# Altium PCB STM32H743_PCB.PcbDoc (part 2 of 2)
Units mm, origin at the board's own origin, x right, y up, seen from the top; angles counter-clockwise.
Board outline 65 x 50 mm, 4 copper layers (Top, Signal, GND, Bottom), stack 0.603 mm thick; 86 components, 110 nets, 449 pads, 169 vias.
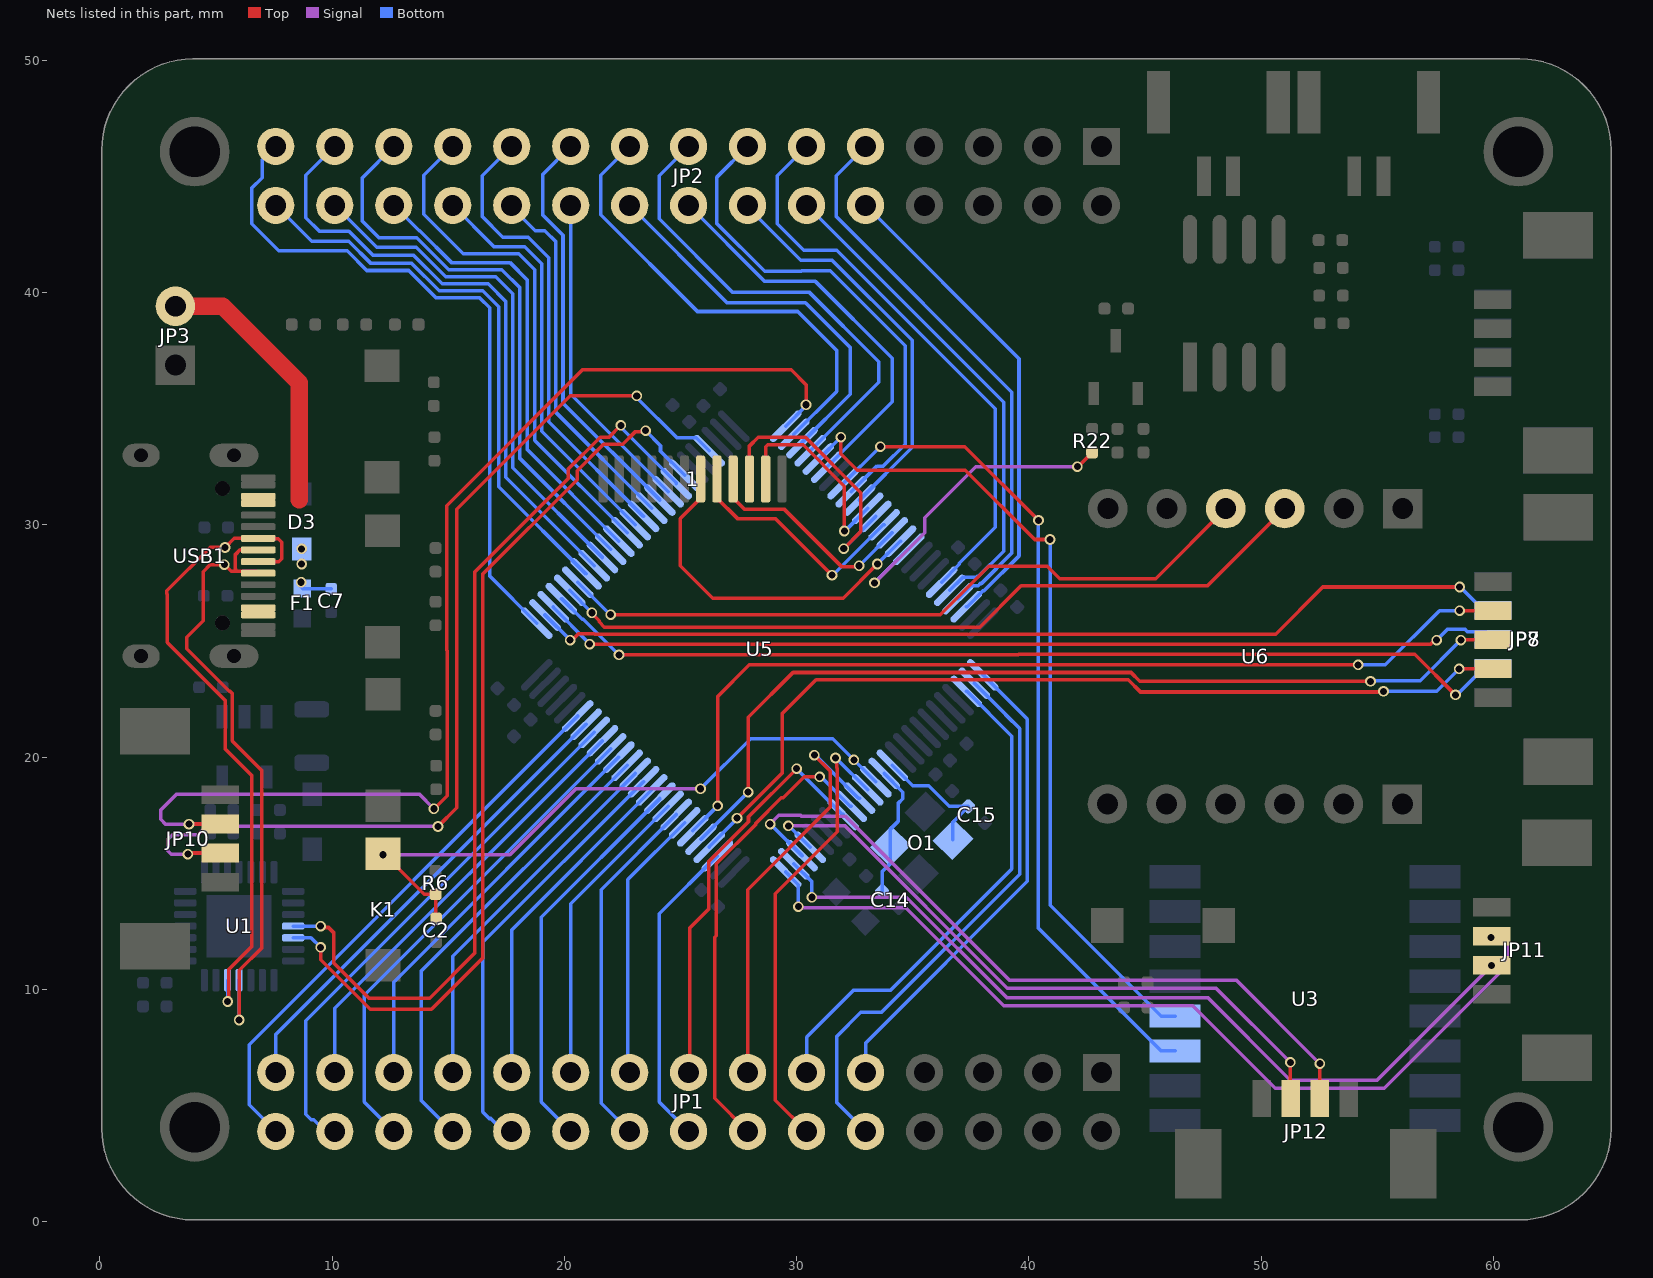
[diagram p4: the nets of this part, all layers, seen from the top]

## Via types
v1: diameter 0.457, hole 0.305, Top to Bottom, 159 vias
v2: diameter 0.711, hole 0.356, Top to Bottom, 10 vias

## Nets (pads, with @x,y where several pads share a name; then routed paths per layer and width w, separated by ;. In a path a pad name is that pad's centre, name@x,y a point inside that pad or via, vN(x,y) a via of type N, cw(c..) or ccw(c..) an arc to the next point about the centre after c; other vN are vias at no path point) (continued)
NRST: C2.2 K1.1 R6.1 U5.14 | length 28.1
  Top w0.152: K1.1@12.192,15.837 12.242,15.837 12.866,15.213 12.866,15.201 13.97,14.097 R6.1@14.453,14.097 14.465,14.084 14.465,13.068 C2.2@14.478,13.056
  Signal w0.152: v1(12.192,15.799) 17.653,15.799 20.498,18.644 v1(25.857,18.644)
  Bottom w0.152: v1(25.857,18.644) 28.016,20.803 31.547,20.803 v1(32.461,19.888) 33.402,18.947 U5.14@33.412,18.947
OSC_IN: C15.2 O1.3 U5.12 | length 5.7
  Bottom w0.152: U5.12@34.119,19.654 35.003,18.771 35.687,18.771 36.572,17.885 C15.2@37.385,17.885 37.012,17.512 37.012,17.475 36.726,17.189 O1.3@36.726,16.448
OSC_OUT: C14.2 O1.1 U5.13 | length 5.8
  Bottom w0.152: C14.2@33.677,14.228 33.677,15.063 34.039,15.425 O1.1@34.039,16.165 34.039,16.906 34.366,17.234 34.366,18.009 34.569,18.212 34.569,18.497 U5.13@33.766,19.301
PA4: JP1.16 U5.28 | length 13.4
  Bottom w0.152: JP1.16@25.349,3.886 24.079,5.156 24.079,13.256 U5.28@26.588,15.765
PA8: JP2.20 U5.67 | length 14.1
  Bottom w0.152: JP2.20@20.269,43.764 20.269,35.625 U5.67@24.467,31.428
PA15: JP2.17 U5.77 | length 20.4
  Bottom w0.152: JP2.17@22.809,46.304 21.565,45.06 21.565,43.358 25.73,39.192 30.048,39.192 31.725,37.516 31.725,35.751 U5.77@29.877,33.903
PB0: JP1.19 U5.34 | length 13.2
  Bottom w0.152: JP1.19@20.269,6.426 20.269,13.689 U5.34@24.467,17.886
PB1: JP1.20 U5.35 | length 17
  Bottom w0.152: JP1.20@20.269,3.886 18.999,5.156 18.999,13.106 24.113,18.22 U5.35@24.113,18.24
PB2: JP1.21 U5.36 | length 14.7
  Bottom w0.152: JP1.21@17.729,6.426 17.729,12.563 U5.36@23.76,18.593
PB8: JP2.11 U5.95 | length 25
  Bottom w0.152: JP2.11@30.429,46.304 29.159,45.034 29.159,42.977 30.302,41.834 31.725,41.834 38.557,35.001 38.557,29.896 37.008,28.346 37.008,28.306 U5.95@36.241,27.539
PB9: JP2.12 U5.96 | length 21.4
  Bottom w0.152: JP2.12@30.429,43.764 38.913,35.281 38.913,28.868 37.83,27.786 37.787,27.786 37.741,27.741 37.149,27.741 U5.96@36.594,27.185
PB12: JP2.29 U5.51 | length 29.9
  Bottom w0.152: JP2.29@7.569,46.304 6.985,45.72 6.985,44.958 6.541,44.514 6.541,42.964 7.696,41.808 10.643,41.808 11.493,40.958 13.298,40.958 14.479,39.776 16.358,39.776 16.777,39.358 16.777,27.804 U5.51@18.81,25.771
PC0: JP1.12 U5.15 | length 19.7
  Top w0.152: JP1.12@30.429,3.886 29.083,5.232 29.083,14.122 31.75,16.789 31.75,19.532 31.732,19.55 31.732,19.906 v1(31.674,19.964)
  Bottom w0.152: v1(31.674,19.964) 31.688,19.964 U5.15@33.059,18.593
PC1: JP1.13 U5.16 | length 18.1
  Top w0.152: JP1.13@27.889,6.426 27.889,14.3 31.445,17.856 31.445,19.406 v1(30.759,20.091)
  Bottom w0.152: v1(30.759,20.091) 30.814,20.091 32.665,18.24 U5.16@32.705,18.24
PC2: JP1.14 U5.17 | length 20.1
  Top w0.152: JP1.14@27.889,3.886 26.467,5.309 26.467,12.243 26.543,12.319 26.543,15.41 28.231,17.098 28.231,17.142 29.338,18.25 29.426,18.25 30.328,19.152 v1(30.988,19.152)
  Bottom w0.152: v1(30.988,19.152) 31.046,19.152 32.311,17.886 U5.17@32.351,17.886
PC3: JP1.15 U5.18 | length 17.8
  Top w0.152: JP1.15@25.349,6.426 25.4,6.477 25.4,12.649 26.213,13.462 26.213,15.511 27.926,17.224 27.926,17.436 v1(29.997,19.507)
  Bottom w0.152: v1(29.997,19.507) 29.997,19.496 31.96,17.533 U5.18@31.998,17.533
PC4: JP1.17 U5.32 | length 11.8
  Bottom w0.152: JP1.17@22.809,6.426 22.733,6.502 22.733,14.732 25.174,17.173 U5.32@25.174,17.179
PC5: JP1.18 U5.33 | length 15.5
  Bottom w0.152: JP1.18@22.809,3.886 21.59,5.105 21.59,14.3 24.82,17.53 U5.33@24.82,17.533
PC6: JP2.24 U5.63 | length 17.8
  Bottom w0.152: JP2.24@15.189,43.764 16.967,41.986 18.288,41.986 19.025,41.25 19.025,34.042 U5.63@23.052,30.014
PC7: JP2.21 U5.64 | length 20
  Bottom w0.152: JP2.21@17.729,46.304 16.459,45.034 16.459,43.282 17.348,42.393 18.44,42.393 19.329,41.504 19.329,34.444 U5.64@23.406,30.367
PC8: JP2.22 U5.65 | length 15.8
  Bottom w0.152: JP2.22@17.729,43.764 17.729,43.688 18.745,42.672 19.152,42.672 19.634,42.189 19.634,34.846 U5.65@23.76,30.721
PC9: JP2.19 U5.66 | length 17.8
  Bottom w0.152: JP2.19@20.269,46.304 19.075,45.11 19.075,43.332 19.939,42.469 19.939,35.248 U5.66@24.113,31.074
PC10: JP2.18 U5.78 | length 17
  Bottom w0.152: JP2.18@22.809,43.764 27,39.573 30.378,39.573 32.309,37.643 32.309,35.628 U5.78@30.23,33.549
PC11: JP2.15 U5.79 | length 20.7
  Bottom w0.152: JP2.15@25.349,46.304 24.079,45.034 24.079,43.18 27.229,40.03 30.531,40.03 33.528,37.033 33.528,36.14 U5.79@30.584,33.196
PD0: JP2.16 U5.81 | length 17.4
  Bottom w0.152: JP2.16@25.349,43.764 28.626,40.488 30.81,40.488 34.112,37.186 34.112,35.31 U5.81@31.291,32.489
PD3: JP2.13 U5.84 | length 21.6
  Bottom w0.152: JP2.13@27.889,46.304 26.568,44.983 26.568,42.976 28.625,40.919 30.201,40.919 30.226,40.945 31.445,40.945 34.671,37.719 34.671,33.477 33.731,32.537 33.461,32.537 U5.84@32.351,31.428
PD4: JP2.14 U5.85 | length 17.4
  Bottom w0.152: JP2.14@27.889,43.764 27.889,43.688 30.175,41.402 31.521,41.402 34.976,37.948 34.976,33.345 U5.85@32.705,31.074
PD10: JP2.30 U5.57 | length 24.5
  Bottom w0.152: JP2.30@7.569,43.764 9.119,42.215 10.719,42.215 11.671,41.263 13.424,41.263 14.606,40.081 16.485,40.081 17.17,39.395 17.17,31.653 U5.57@20.931,27.892
PD11: JP2.27 U5.58 | length 26.6
  Bottom w0.152: JP2.27@10.109,46.304 8.865,45.06 8.865,43.231 9.45,42.645 10.72,42.645 11.76,41.605 13.513,41.605 14.732,40.386 16.713,40.386 17.475,39.624 17.475,32.055 U5.58@21.285,28.246
PD12: JP2.28 U5.59 | length 22.2
  Bottom w0.152: JP2.28@10.109,43.764 11.912,41.961 13.615,41.961 14.885,40.691 17.043,40.691 17.78,39.954 17.78,32.458 U5.59@21.638,28.6
PD13: JP2.25 U5.60 | length 24.6
  Bottom w0.152: JP2.25@12.649,46.304 11.303,44.958 11.303,43.078 12.014,42.367 13.64,42.367 15.011,40.996 17.297,40.996 18.085,40.208 18.085,32.86 U5.60@21.992,28.953
PD14: JP2.26 U5.61 | length 20
  Bottom w0.152: JP2.26@12.649,43.764 13.741,42.672 13.766,42.672 15.138,41.3 17.653,41.3 18.39,40.564 18.39,33.262 U5.61@22.345,29.307
PD15: JP2.23 U5.62 | length 22.2
  Bottom w0.152: JP2.23@15.189,46.304 13.945,45.06 13.945,43.383 15.646,41.681 18.034,41.681 18.72,40.996 18.72,33.639 U5.62@22.699,29.66
PE0: JP2.9 U5.97 | length 24.3
  Bottom w0.152: JP2.9@32.969,46.304 31.699,45.034 31.699,43.282 39.268,35.712 39.268,28.793 37.957,27.481 37.913,27.481 37.822,27.39 37.506,27.39 U5.97@36.948,26.832
PE1: JP2.10 U5.98 | length 21
  Bottom w0.152: JP2.10@32.969,43.764 39.573,37.16 39.573,28.667 38.083,27.176 38.039,27.176 37.341,26.478 U5.98@37.301,26.478
PE2: JP1.9 U5.1 | length 20.8
  Bottom w0.152: JP1.9@32.969,6.426 32.969,7.696 39.929,14.656 39.929,21.644 38.03,23.543 U5.1@38.008,23.543
PE3: JP1.10 U5.2 | length 24.4
  Bottom w0.152: JP1.10@32.969,3.886 31.725,5.131 31.725,7.976 32.766,9.017 33.655,9.017 39.599,14.961 39.599,21.234 39.014,21.819 39.014,21.83 U5.2@37.655,23.19
PE4: JP1.11 U5.3 | length 21.8
  Bottom w0.152: JP1.11@30.429,6.426 30.429,7.95 32.436,9.957 34.036,9.957 39.268,15.189 39.268,20.904 37.337,22.836 U5.3@37.301,22.836
PE7: JP1.22 U5.37 | length 18.7
  Bottom w0.152: JP1.22@17.729,3.886 17.39,3.886 16.832,4.444 16.765,4.444 16.485,4.724 16.485,12.026 U5.37@23.406,18.947
PE8: JP1.23 U5.38 | length 16.1
  Bottom w0.152: JP1.23@15.189,6.426 15.189,11.43 21.514,17.755 21.514,17.762 U5.38@23.052,19.301
PE9: JP1.24 U5.39 | length 20
  Bottom w0.152: JP1.24@15.189,3.886 15.164,3.886 13.843,5.207 13.843,10.798 U5.39@22.699,19.654
PE10: JP1.25 U5.40 | length 17.6
  Bottom w0.152: JP1.25@12.649,6.426 12.649,10.312 U5.40@22.345,20.008
PE11: JP1.26 U5.41 | length 21.4
  Bottom w0.152: JP1.26@12.649,3.886 11.379,5.156 11.379,9.749 U5.41@21.992,20.361
PE12: JP1.27 U5.42 | length 19.1
  Bottom w0.152: JP1.27@10.109,6.426 10.109,9.186 U5.42@21.638,20.715
PE13: JP1.28 U5.43 | length 23.1
  Bottom w0.152: JP1.28@10.109,3.886 9.717,3.886 9.211,4.393 9.094,4.393 8.865,4.623 8.865,8.648 U5.43@21.285,21.068
PE14: JP1.29 U5.44 | length 20.5
  Bottom w0.152: JP1.29@7.569,6.426 7.569,8.06 U5.44@20.931,21.422
PE15: JP1.30 U5.45 | length 24.2
  Bottom w0.152: JP1.30@7.569,3.886 6.426,5.029 6.426,7.624 U5.45@20.578,21.775
SPI1_MISO: JP7.3 U5.30 | length 39.8
  Top w0.152: v1(27.907,18.499) 27.915,18.506 27.915,21.717 29.845,23.647 44.398,23.647 44.779,23.266 v1(54.712,23.266) ; v1(58.598,25.044) 58.609,25.056 JP7.3@59.978,25.056
  Bottom w0.152: U5.30@25.881,16.472 v1(27.907,18.499) ; v1(54.712,23.266) 54.737,23.292 56.845,23.292 v1(58.598,25.044)
SPI1_MOSI: JP7.4 U5.31 | length 41.1
  Top w0.152: v1(26.594,17.907) 26.594,22.606 27.965,23.978 v1(54.178,23.978) ; v1(58.547,26.314) 58.555,26.306 JP7.4@59.978,26.306
  Bottom w0.152: U5.31@25.527,16.826 25.527,16.833 26.594,17.9 v1(26.594,17.907) ; v1(54.178,23.978) 55.347,23.978 57.683,26.314 v1(58.547,26.314)
SPI1_SCK: JP7.2 U5.29 | length 38.9
  Top w0.152: v1(27.43,17.375) 29.388,19.333 29.388,21.895 30.836,23.343 44.272,23.343 44.806,22.809 55.245,22.809 v1(55.27,22.835) ; v1@58.522,23.8 v1(58.528,23.806) JP7.2@59.978,23.806
  Bottom w0.152: U5.29@26.234,16.119 26.234,16.149 27.43,17.345 v1(27.43,17.375) ; v1(55.27,22.835) 57.556,22.835 v1(58.528,23.806)
SPI2_MISO: JP8.3 U5.53 | length 41.6
  Top w0.152: v1(21.082,24.867) 57.296,24.867 57.474,25.044 v1(57.556,25.044)
  Bottom w0.152: U5.53@19.517,26.478 19.517,26.455 21.082,24.89 v1(21.082,24.867) ; v1(57.556,25.044) 58.014,25.502 58.787,25.502 58.881,25.407 59.654,25.407 JP8.3@59.978,25.084
SPI2_MOSI: JP8.4 U5.54 | length 42.3
  Top w0.152: v1(22.352,24.409) 39.542,24.409 39.567,24.435 56.617,24.435 v1(58.369,22.682)
  Bottom w0.152: U5.54@19.87,26.832 19.875,26.832 20.771,25.935 20.813,25.935 22.338,24.409 v1(22.352,24.409) ; v1(58.369,22.682) 58.427,22.682 59.578,23.834 JP8.4@59.978,23.834
SPI2_SCK: JP8.2 U5.52 | length 42.6
  Top w0.152: v1(20.244,25.044) 20.326,25.044 20.606,25.324 21.271,25.324 21.297,25.298 50.622,25.298 52.654,27.33 v1(58.547,27.33)
  Bottom w0.152: U5.52@19.163,26.125 v1(20.244,25.044) ; v1(58.547,27.33) 58.581,27.33 59.578,26.334 JP8.2@59.978,26.334
SPI3_MOSI: 1.10 U5.87 | length 12.2
  Top w0.152: 1.10@27.966,31.979 27.966,33.402 28.346,33.782 30.378,33.782 32.766,31.394 32.766,29.721 v1(32.026,28.981)
  Bottom w0.152: v1@31.877,28.981 v1(32.026,28.981) U5.87@33.412,30.367
SPI3_SCK: 1.9 U5.89 | length 9.5
  Top w0.152: 1.9@27.266,31.979 27.266,31.163 27.76,30.669 29.478,30.669 31.953,28.194 32.639,28.194 v1(32.69,28.245)
  Bottom w0.152: v1(32.69,28.245) 34.105,29.66 U5.89@34.119,29.66
SWCLK: JP10.2 U5.76 | length 49.1
  Top w0.152: v1(3.835,17.12) 3.841,17.125 JP10.2@5.182,17.125 ; v1(14.376,17.78) 14.397,17.78 14.961,18.344 14.961,24.577 14.935,24.602 14.935,30.836 20.777,36.678 29.769,36.678 30.404,36.043 v1(30.404,35.179)
  Signal w0.152: v1@3.785,17.069 v1(3.835,17.12) 2.819,17.12 2.616,17.323 2.616,17.729 3.302,18.415 13.741,18.415 v1(14.376,17.78)
  Bottom w0.152: U5.76@29.523,34.256 30.378,35.112 30.378,35.154 v1(30.404,35.179)
SWDIO: JP10.3 U5.72 | length 42.6
  Top w0.152: v1(3.785,15.824) 3.835,15.875 JP10.3@5.182,15.875 ; v1(14.554,17.018) 15.367,17.831 15.367,30.683 20.244,35.56 v1(23.114,35.56)
  Signal w0.152: v1(3.785,15.824) 3.073,15.824 2.921,15.977 2.921,16.459 3.124,16.662 4.216,16.662 4.572,17.018 v1(14.554,17.018)
  Bottom w0.152: v1(23.114,35.56) 23.114,35.484 24.847,33.751 25.679,33.751 U5.72@26.234,33.196
TFT_BLK: R22.2 U5.91 | length 14.2
  Top w0.152: v1(42.088,32.512) 42.113,32.512 R22.2@42.723,33.122
  Signal w0.152: v1(33.35,27.508) 35.509,29.667 35.509,30.314 37.707,32.512 v1(42.088,32.512)
  Bottom w0.152: v1(33.35,27.508) 34.795,28.953 U5.91@34.826,28.953
TFT_CS: 1.8 U5.88 | length 10.3
  Top w0.152: 1.8@26.566,31.979 26.566,31.163 27.452,30.277 29.083,30.277 v1(31.521,27.838)
  Bottom w0.152: v1(31.521,27.838) 31.556,27.838 33.731,30.014 U5.88@33.766,30.014
TFT_DC: 1.7 U5.90 | length 15.2
  Top w0.152: 1.7@25.866,31.979 25.866,31.163 25.324,30.62 25.324,30.607 24.994,30.277 24.994,28.245 26.391,26.848 32.004,26.848 v1(33.477,28.321)
  Bottom w0.152: v1(33.477,28.321) 34.463,29.307 U5.90@34.473,29.307
TFT_RES: 1.11 U5.86 | length 8.9
  Top w0.152: 1.11@28.666,31.979 28.666,33.363 28.755,33.452 30.278,33.452 32.055,31.675 v1(32.055,29.743)
  Bottom w0.152: v1(32.055,29.743) 32.081,29.743 U5.86@33.059,30.721
UART1_RX: U1.26 U5.69 | length 39.6
  Top w0.152: v1(9.5,11.811) 9.5,11.278 11.633,9.144 14.275,9.144 16.485,11.354 16.485,27.889 20.549,31.953 20.549,32.342 21.684,33.477 22.509,33.477 23.038,34.006 23.439,34.006 v1(23.495,34.061)
  Bottom w0.152: U1.26@8.319,12.225 9.085,12.225 v1(9.5,11.811) ; v1(23.495,34.061) 24.138,33.419 24.138,33.171 U5.69@25.174,32.135
UART1_TX: U1.25 U5.68 | length 39.7
  Top w0.152: v1(9.5,12.725) 9.558,12.667 9.844,12.667 10.058,12.452 10.058,11.15 11.582,9.627 14.199,9.627 16.129,11.557 16.129,27.965 20.155,31.991 20.155,32.398 21.539,33.782 21.92,33.782 v1(22.428,34.29)
  Bottom w0.152: U1.25@8.319,12.725 v1(9.5,12.725) ; v1(22.428,34.29) 22.428,34.213 24.82,31.821 U5.68@24.82,31.782
UART2_RX: JP11.3 U5.25 | length 39.4
  Signal w0.152: v1(30.074,13.564) 30.124,13.513 34.696,13.513 38.913,9.296 47.054,9.296 50.61,5.74 55.296,5.74 60.604,11.049 60.604,11.9 60.319,12.184 59.952,12.184 v1(59.893,12.243)
  Bottom w0.152: U5.25@29.523,15.058 30.074,14.507 v1(30.074,13.564)
UART2_TX: JP11.2 U5.24 | length 36.3
  Signal w0.152: v1(30.658,13.97) 34.725,13.97 39.043,9.652 47.701,9.652 51.257,6.096 54.991,6.096 v1(59.919,11.024)
  Bottom w0.152: U5.24@29.877,15.411 30.658,14.63 v1(30.658,13.97)
UART3_RX: U5.56 U6.4 | length 30.8
  Top w0.152: v1(21.988,26.137) 36.181,26.137 38.264,28.219 40.792,28.219 41.326,27.686 45.457,27.686 U6.4@48.478,30.707
  Bottom w0.152: U5.56@20.578,27.539 21.98,26.137 v1(21.988,26.137) v1@21.996,26.137
UART3_TX: U5.55 U6.3 | length 33.6
  Top w0.152: v1(21.184,26.219) 21.184,26.19 21.492,25.881 21.492,25.828 21.717,25.603 37.883,25.603 39.661,27.381 47.692,27.381 U6.3@51.018,30.707
  Bottom w0.152: U5.55@20.224,27.185 21.184,26.226 v1(21.184,26.219) v1@21.184,26.213
UART4_RX: JP12.3 U5.23 | length 31.7
  Top w0.152: v1(52.527,6.807) 52.529,6.806 JP12.3@52.529,5.3
  Signal w0.152: v1(28.854,17.12) 29.235,17.501 30.175,17.501 30.226,17.45 32.107,17.45 39.169,10.389 48.946,10.389 v1(52.527,6.807)
  Bottom w0.152: v1(28.854,17.12) 28.875,17.12 U5.23@30.23,15.765
UART4_TX: JP12.2 U5.22 | length 28.7
  Top w0.152: v1(51.257,6.858) 51.257,5.321 JP12.2@51.279,5.3
  Signal w0.152: v1(29.642,17.043) 32.083,17.043 39.068,10.058 48.057,10.058 v1(51.257,6.858)
  Bottom w0.152: v1(29.642,17.043) 29.659,17.043 U5.22@30.584,16.119
UART5_RX: U3.3 U5.83 | length 36
  Top w0.152: v1(33.604,33.376) 37.236,33.376 v1(40.411,30.201)
  Bottom w0.152: U5.83@31.998,31.782 33.592,33.376 v1(33.604,33.376) ; v1(40.411,30.201) 40.411,12.632 45.692,7.351 U3.3@46.292,7.351
UART5_TX: U3.4 U5.80 | length 35.7
  Top w0.152: v1(31.902,33.782) 31.902,33.071 32.614,32.36 37.262,32.36 40.246,29.375 v1(40.907,29.375)
  Bottom w0.152: U5.80@30.937,32.842 30.963,32.842 v1(31.902,33.782) ; v1@40.894,29.388 v1(40.907,29.375) 40.919,29.362 40.919,13.624 45.692,8.851 U3.4@46.292,8.851
USB_DN: U1.5 USB1.A7 USB1.B7 | length 28.3
  Top w0.152: v1(5.494,9.482) 5.537,9.525 5.537,10.846 6.528,11.836 6.528,19.228 5.385,20.371 5.385,22.454 2.896,24.943 2.896,27.026 2.883,27.039 2.883,27.165 4.75,29.032 v1(5.385,29.032) 5.779,29.427 USB1.B7@6.813,29.427 6.826,29.413 7.671,29.413 7.823,29.261 7.823,28.55 7.696,28.423 6.817,28.423 USB1.A7@6.813,28.427
  Bottom w0.152: v1@5.486,9.474 v1(5.494,9.482) U1.5@5.494,10.401
USB_DP: U1.4 USB1.A6 USB1.B6 | length 27.5
  Top w0.152: v1(5.994,8.687) 5.994,10.82 6.96,11.786 6.96,19.431 5.69,20.701 5.69,22.745 5.6,22.835 5.563,22.835 3.734,24.663 3.734,25.171 4.445,25.883 4.445,27.991 4.75,28.296 v1(5.359,28.296) 5.655,28 5.914,28 ; USB1.B6@6.813,27.927 6.739,28 5.914,28 ; USB1.A6@6.813,28.927 6.809,28.931 6.033,28.931 5.834,28.732 5.834,28.08 5.914,28
  Bottom w0.152: v1(5.994,8.687) U1.4@5.994,10.401
VBUS: C7.2 D3.2 F1.1 JP3.2 USB1.A4 USB1.A9 USB1.B4 USB1.B9 | length 13
  Top w0.762: JP3.2@3.251,39.421 5.283,39.421 8.585,36.119 8.585,31.09
  Bottom w0.152: F1.1@8.712,27.269 8.727,27.254 C7.2@9.957,27.254
  other v1: 8.661,27.534 8.687,28.321 8.687,28.97
pads on no net: H1.1 H2.1 H3.1 H4.1 JP4.0 JP5.0 JP6.3 JP6.4 JP7.0 JP8.0 JP9.3 JP9.4 JP10.0 JP11.0 JP12.0 U1.1 U1.2 U1.6 U1.10 U1.11 U1.12 U1.13 U1.14 U1.15 U1.16 U1.17 U1.18 U1.19 U1.20 U1.21 U1.22 U1.23 U1.24 U1.27 U1.28 U3.5 U3.6 U3.7 U3.8 U3.9 U3.10 U3.13 U3.14 U3.15 U6.1 U6.6 U6.7 U6.8 U6.9 U6.10 U6.11 U6.12 USB1.0 USB1.A8 USB1.B8

## Polygon pours and split planes (outlines as drawn)
GND on Top "GND_L01_P007" (solid, pour order 7): 0.127,50.038 0.102,50.013 0.102,0.051 65.075,0.051 65.075,50.038
VBUS on Top "VBUS_L01_P000" (solid, pour order 0): 6.071,31.369 9.296,31.369 9.296,25.959 5.994,25.959 5.994,26.518 7.874,26.518 7.874,30.759 7.849,30.785 6.071,30.785
GND on Bottom "GND_L04_P008" (solid, pour order 8): 0.102,50.063 0.102,0.051 65.075,0.051 65.075,50.038
+5V on Bottom "+5V_L04_P003" (solid, pour order 3): 9.068,26.34 9.068,22.708 5.69,22.708 5.69,21.107 4.775,21.107 4.775,23.393 7.163,23.393 7.163,26.34
3V3 on Bottom "3V3_L04_P005" (solid, pour order 5): 10.109,20.142 10.109,17.399 7.341,17.399 7.315,17.374 7.315,18.186 7.341,18.186 8.052,18.898 8.052,20.142
VBUS on Bottom "VBUS_L04_P001" (solid, pour order 1): 9.119,29.489 9.119,26.848 8.204,26.848 8.204,29.515
NetL1_1 on Bottom "NETL1_1_L04_P004" (solid, pour order 4): 9.881,22.403 9.881,21.26 6.858,21.26 6.858,22.403
GND on GND "GND_L03_P006" (solid, pour order 6): 0.152,50.038 0.102,49.987 0.102,0.051 65.151,0.051 65.075,0.127 65.075,50.038

## Other copper
Top:
  pour cut-out: 4.678,27.894 4.678,25.931 5.129,25.931 5.273,25.787 5.28,25.794 5.994,25.794 5.994,26.353 5.829,26.518 5.895,26.584 5.895,27.58 5.96,27.645 5.914,27.691 5.914,28 5.369,28 5.284,27.915 5.136,28.063 4.846,28.063
  pour cut-out: 4.242,18.085 4.242,17.452 4.468,17.677 5.191,17.677 5.191,17.731 5.265,17.804 5.255,17.815 5.255,17.823 4.229,17.823
  pour cut-out: 8.992,12.167 9.119,12.04 9.119,11.887 9.424,11.887 9.5,11.811 9.825,12.137 9.825,12.4 9.558,12.667 9.54,12.65 9.119,12.65
  pour cut-out: 12.827,16.256 12.827,15.24 13.97,14.097 14.607,14.097 14.864,14.355 14.864,15.108 13.511,16.461 13.3,16.461 13.094,16.255
  pour cut-out: 44.475,24.155 44.475,23.724 44.398,23.647 44.83,23.216 52.654,23.216 52.938,23.499 54.005,23.499 54.005,24.135 53.873,24.003 46.05,24.003 45.999,24.054 45.949,24.003 45.161,24.003
  pour cut-out: 50.444,25.121 53.238,25.121 53.924,24.435 56.617,24.435 59.004,22.047 60.757,22.047 61.048,22.338 61.048,23.671 61.542,23.671 61.722,23.851 61.697,23.876 61.697,27.369 61.126,27.94 59.157,27.94 58.547,27.33 52.654,27.33
  pour cut-out: 46.253,29.007 46.253,28.397 45.364,27.508 45.593,27.28 47.828,27.28 49.378,28.829 49.378,29.337 49.505,29.337 50.521,30.353 50.521,31.115 50.47,31.115 50.013,31.572 49.86,31.42 48.819,31.42 48.819,30.81 47.906,29.897 47.906,29.805 47.484,29.805 47.193,29.515
  pour cut-out: 40.343,29.608 39.561,28.827 39.561,28.252 40.759,28.252 41.326,27.686 41.935,28.296 41.935,28.885 41.077,29.743 37.948,29.743
  pour cut-out: 39.7,28.016 39.661,27.977 39.661,27.381 41.021,27.381 41.097,27.457 41.056,27.499 41.056,28.285 39.594,28.285 39.528,28.219
  pour cut-out: 36.449,26.264 36.551,26.162 36.551,25.679 38.159,25.679 38.307,25.531 39.622,25.531 39.622,25.682 38.227,27.076 37.033,27.076 36.881,26.924
  pour cut-out: 24.994,30.277 25.324,29.947 25.324,27.559 26.619,27.559 27.407,26.772 27.483,26.848 32.004,26.848 32.741,27.584 32.664,27.661 32.664,28.219 31.496,28.219 28.753,30.963 26.23,30.963 26.148,30.881
  pour cut-out: 14.478,16.637 15.367,15.748 15.773,15.748 15.773,27.711 21.184,33.122 22.016,33.122 23.279,34.384 22.307,35.357 21.031,35.357 15.164,29.489 15.164,18.547 14.961,18.344
  pour cut-out: 32.36,33.63 32.733,33.257 32.733,32.593 37.029,32.593 39.61,30.011 41.02,30.011 41.554,29.477 41.787,29.71 41.787,30.653 38.354,34.087 32.664,34.087 32.487,34.265
  pour cut-out: 22.022,35.357 22.022,34.493 22.809,33.706 28.524,33.706 29.647,34.829 30.253,34.829 30.253,36.523 29.616,37.16 25.095,37.16 24.816,36.881
  pour cut-out: 20.874,36.445 14.961,30.531 14.961,30.277 15.9,30.277 16.358,29.82 21.463,34.925 23.47,34.925 24.816,36.271 24.816,36.881
  pour cut-out: 11.341,39.045 11.807,38.58 11.807,38.045 13.061,38.045 13.081,38.024 13.09,38.033 13.09,38.869 11.771,38.869 11.595,39.045
  pour cut-out: 47.534,46.269 47.887,45.915 47.887,43.412 48.644,43.412 49.479,44.247 49.479,45.796 49.352,45.796 48.756,46.393
  pour cut-out: 48.387,41.758 48.387,39.929 48.768,39.929 49.657,39.04 51.511,39.04 51.511,41.58 50.307,42.784 50.307,43.43 49.195,43.43 49.149,43.383
  pour cut-out: 49.16,46.138 49.16,44.01 50.749,42.421 50.749,41.199 51.46,40.488 51.346,40.374 51.346,38.875 52.565,38.875 53.67,37.77 54.178,38.278 54.966,38.278 54.966,39.395 55.296,39.726 55.194,39.827 55.194,44.272 55.036,44.43 55.036,46.208 54.508,46.736 49.428,46.736 49.251,46.558
  pour cut-out: 25.4,12.649 25.298,12.548 25.298,6.671 27.229,4.74 27.229,4.115 28.854,4.115 29.667,3.301 30.555,4.189 30.555,6.987 29.316,8.225 29.316,14.685 32.182,17.551 32.182,19.913 31.75,20.345 31.253,19.849 29.621,19.849
  pour cut-out: 26.975,23.47 26.073,22.568 26.073,17.742 27.737,16.078 29.667,16.078 29.667,16.154 31.648,18.136 31.648,21.692 31.191,22.149 31.191,24.155 28.169,24.155 27.864,24.46
Bottom:
  pour cut-out: 57.353,42.39 57.353,41.935 57.023,41.605 59.258,41.605 59.258,43.282 59.106,43.434 58.699,43.028 56.82,43.028 56.82,42.144 57.511,41.453
  pour cut-out: 57.48,41.196 57.734,40.942 57.734,39.548 58.268,39.014 58.776,39.522 59.588,39.522 59.588,40.945 59.235,41.299 57.152,41.299
  pour cut-out: 58.699,38.329 58.633,38.329 57.82,37.516 57.82,35.255 60.173,35.255 60.35,35.078 61.239,35.966 61.544,35.966 61.544,37.744 61.239,38.049 61.239,39.395 59.176,39.395 59.072,39.291
  pour cut-out: 59.083,34.597 59.083,33.894 59.195,33.782 59.652,34.239 60.884,34.239 60.884,35.209 60.981,35.306 60.439,35.848 58.55,35.848 57.957,35.255 57.683,35.255
  pour cut-out: 54.94,32.106 54.94,29.728 55.738,28.931 58.471,28.931 58.471,30.937 59.182,31.648 58.924,31.906 58.924,33.549 58.577,33.549 57.683,34.442 58.343,35.102 59.588,35.102
  pour cut-out: 54.484,24.211 54.86,23.835 54.86,23.618 55.275,23.618 56.007,22.885 56.032,22.911 58.776,22.911 60.251,24.386 60.931,24.386 60.931,26.412 60.935,26.416 60.808,26.543 60.808,27.483 59.436,27.483 58.591,26.637 57.773,26.637 57.074,25.938 57.074,25.324 55.961,24.211 55.25,24.211
  pour cut-out: 41.27,16.363 40.564,15.657 40.564,12.675 44.755,8.484 44.755,8.153 45.327,8.153 45.999,8.826 45.999,15.469 45.517,15.951
  pour cut-out: 45.06,15.875 45.06,6.35 45.898,5.512 47.879,5.512 47.879,10.77 48.057,10.947 47.346,11.659 47.346,15.342 46.025,15.342 45.72,15.646
  pour cut-out: 56.388,5.283 56.388,4.743 56.37,4.724 59.157,4.724 60.173,5.74 60.173,9.449 58.745,10.877 58.745,15.504 56.24,15.504 56.388,15.355 56.388,2.743 56.744,2.388 57.048,2.692 58.826,2.692
  pour cut-out: 10.058,10.389 9.703,10.033 9.703,7.352 10.426,6.629 6.604,6.629 6.604,2.007 6.807,1.803 6.985,1.981 38.506,1.981 38.506,2.591 40.843,4.928 40.437,5.334 37.084,5.334 36.576,4.826 36.563,4.839 35.384,4.839 35.384,5.205 34.188,6.401 34.188,10.185 33.706,9.703 31.852,9.703 30.186,8.036 30.186,7.37 24.456,7.37 24.312,7.514 24.312,13.16 24.387,13.16 26.238,15.011 26.238,15.723 25.044,16.916 22.352,16.916
  pour cut-out: 39.675,24.359 39.675,24.028 38.608,22.962 39.649,21.92 39.649,21.666 40.162,21.666 40.386,21.442 40.386,23.825 39.954,24.257
  pour cut-out: 37.871,20.777 37.871,19.507 37.816,19.451 38.395,18.872 39.7,18.872 39.7,20.549 38.608,21.641 38.608,21.742
  pour cut-out: 21.158,22.734 21.539,22.353 21.539,21.412 21.971,21.412 25.07,18.313 27.792,21.036 31.314,21.036 32.932,19.418 34.364,20.85 34.364,22.761 33.807,23.317 22.403,23.317 21.946,23.774 21.768,23.774
  pour cut-out: 25.959,19.837 25.959,18.515 25.631,18.187 27,16.818 27,15.977 30.018,15.977 30.23,15.765 30.642,16.177 30.642,17.641 30.518,17.641 29.058,19.101 29.782,19.825 29.782,19.83 29.992,19.83 30.506,19.316 30.697,19.507 31.09,19.507 31.09,20.701 31.267,20.879 30.912,21.234 27.381,21.234 27.051,20.904
  pour cut-out: 16.942,31.521 16.891,31.471 16.891,28.118 17.043,28.118 18.771,29.845 17.755,30.861 17.755,31.191
  pour cut-out: 17.45,22.962 18.546,21.866 18.546,21.619 18.945,21.619 19.66,20.904 20.371,21.615 20.371,22.301 21.641,23.571 21.514,23.698 21.514,24.206 19.812,24.206 19.304,24.714
  pour cut-out: 6.502,47.93 6.256,47.684 6.256,43.173 6.129,43.046 6.808,42.367 15.265,42.367 15.57,42.062 16.809,43.301 33.817,43.301 33.817,47.539 33.426,47.93
  pour cut-out: 22.047,44.349 20.65,42.951 19.888,42.951 19.888,40.97 21.717,39.141 32.156,39.141 33.02,38.278 33.02,31.521 33.655,31.521 36.551,28.626 37.211,29.286 38.684,29.286 38.684,35.204 39.726,36.246 39.599,36.373 39.599,37.516 39.218,37.516 32.969,43.764 33.337,44.132 33.337,45.417 22.421,45.417 21.949,45.889

## Silkscreen, mask and mechanical layers (free items; w line width, h text height)
Top Overlay:
  lines w0.203: 49.113,20.712 49.592,20.233 49.625,20.233 ; 49.594,24.222 cw(c49.606,25.222) 50.606,25.222 ; 49.606,20.222 49.606,25.222 54.606,25.222 ; 49.621,20.229 49.621,20.208 49.625,20.208 49.625,20.233 ; 50.154,20.763 49.625,20.233 ; 54.077,25.756 54.606,25.226 ; 54.127,24.714 54.606,25.193 54.606,25.226 ; 54.61,25.222 54.632,25.222 54.632,25.226 54.606,25.226
  text "GND" at 40.157,48.023 h1.52
  text "GND" at 35.255,47.972 h1.52
  text "B12" at 8.026,47.777 h1.4 r90
  text "D11" at 10.564,47.777 h1.4 r90
  text "D13" at 13.086,47.777 h1.4 r90
  text "D15" at 15.623,47.777 h1.4 r90
  text "C7" at 18.161,47.777 h1.4 r90
  text "C9" at 20.698,47.777 h1.4 r90
  text "A15" at 23.236,47.777 h1.4 r90
  text "C11" at 25.773,47.777 h1.4 r90
  text "D3" at 28.311,47.777 h1.4 r90
  text "B8" at 30.848,47.777 h1.4 r90
  text "E0" at 33.385,47.777 h1.4 r90
  text "L" at 46.507,43.891 h1.27
  text "H" at 49.555,43.866 h1.27
  text "L" at 52.934,43.84 h1.27
  text "H" at 56.007,43.815 h1.27
  text "D12" at 9.042,41.351 h1.4
  text "D14" at 11.709,41.351 h1.4
  text "E1" at 33.376,41.027 h1.4 r90
  text "3V3" at 35.585,40.987 h1.52
  text "+5V" at 40.589,40.936 h1.52
  text "B9" at 30.823,40.846 h1.4 r90
  text "D0" at 25.748,40.786 h1.4 r90
  text "D4" at 28.301,40.788 h1.4 r90
  text "C6" at 15.598,40.749 h1.4 r90
  text "C8" at 18.135,40.747 h1.4 r90
  text "A8" at 20.673,40.753 h1.4 r90
  text "D10" at 7.985,40.091 h1.4 r90
  text "C10" at 23.21,40.056 h1.4 r90
  text "C15" at 9.881,39.308 h1.27
  text "C14" at 12.243,39.308 h1.27
  text "-" at 57.887,39.04 h1.02
  text "+" at 5.436,38.659 h1.52
  text "SCL" at 56.591,38.063 h1.27
  text "SDA" at 56.54,36.793 h1.27
  text "PWR" at 7.671,36.754 h1.27
  text "-" at 5.436,36.068 h1.52
  text "PE5" at 9.011,35.712 h1.78 r270
  text "+" at 58.064,35.442 h1.02
  text "IIC1" at 55.816,33.649 h1.52
  text "CAN" at 47.145,33.313 h1.52
  text "GND" at 45.432,29.185 h1.52 r270
  text "TXD" at 50.571,29.108 h1.4 r270
  text "RXD" at 47.981,29.083 h1.4 r270
  text "3V3" at 53.128,28.981 h1.52 r270
  text "PE6" at 9.113,28.677 h1.78 r270
  text "IMU" at 42.064,27.883 h1.52
  text "-" at 58.166,26.899 h1.02
  text "MOSI" at 56.159,25.897 h1.27
  text "MISO" at 56.159,24.652 h1.27
  text "SCK" at 56.617,23.357 h1.27
  text "PC13" at 9.037,22.123 h1.78 r270
  text "+" at 58.166,22.081 h1.02
  text "SPI1" at 55.573,20.358 h1.52
  text "+" at 6.579,17.839 h1.02
  text "CLK" at 6.274,16.727 h1.27
  text "DIO" at 6.375,15.457 h1.27
  text "RST" at 9.088,14.986 h1.78 r270
  text "RST" at 44.45,14.777 h1.78
  text "-" at 6.629,14.097 h1.02
  text "-" at 57.836,12.98 h1.02
  text "RXD" at 56.566,11.913 h1.27
  text "TXD" at 56.591,10.668 h1.27
  text "+" at 57.912,9.33 h1.02
  text "ST-Link" at 0.514,8.765 h1.52
  text "STA" at 45.999,8.656 h1.78
  text "GND" at 40.157,8.272 h1.52
  text "GND" at 35.255,8.221 h1.52
  text "E14" at 8.026,8.026 h1.4 r90
  text "E12" at 10.564,8.026 h1.4 r90
  text "E10" at 13.086,8.026 h1.4 r90
  text "E8" at 15.623,8.026 h1.4 r90
  text "B2" at 18.176,8.026 h1.4 r90
  text "B0" at 20.698,8.026 h1.4 r90
  text "C4" at 23.236,8.026 h1.4 r90
  text "C3" at 25.773,8.026 h1.4 r90
  text "C1" at 28.311,8.026 h1.4 r90
  text "E4" at 30.864,8.026 h1.4 r90
  text "E2" at 33.401,8.026 h1.4 r90
  text "+" at 50.537,6.756 h1.02 r90
  text "-" at 54.229,6.706 h1.02 r90
  text "TXD" at 51.638,6.629 h1.27 r90
  text "RXD" at 52.908,6.553 h1.27 r90
  text "UART2" at 55.526,6.334 h1.52
  text "UART4" at 44.578,6.207 h1.52
  text "+5V" at 40.589,1.185 h1.52
  text "3V3" at 35.585,1.135 h1.52
  text "E9" at 15.598,1.006 h1.4 r90
  text "E7" at 18.151,1.007 h1.4 r90
  text "E3" at 33.36,1.007 h1.4 r90
  text "A4" at 25.763,0.911 h1.4 r90
  text "C2" at 28.285,0.911 h1.4 r90
  text "C0" at 30.823,0.905 h1.4 r90
  text "C5" at 23.21,0.896 h1.4 r90
  text "E11" at 13.076,0.485 h1.4 r90
  text "EB1" at 20.688,0.346 h1.4 r90
  text "E15" at 7.985,0.305 h1.4 r90
  text "E13" at 10.523,0.311 h1.4 r90
Bottom Overlay:
  drawing of 15232 lines, arcs and shapes, not listed
  text "STM32H743 Core Board" at 43.79,39.943 h1.27
  text "+" at 58.75,39.277 h1.02
  text "Designed by Cherry_ywj" at 43.713,38.465 h1.27
  text "SDA" at 58.953,38.089 h1.27
  text "SCL" at 58.953,36.793 h1.27
  text "-" at 58.75,35.459 h1.02
  text "IIC2" at 56.808,33.649 h1.52
  text "+" at 58.826,27.06 h1.02
  text "SCK" at 58.979,25.922 h1.27
  text "MISO" at 58.979,24.627 h1.27
  text "MOSI" at 58.979,23.458 h1.27
  text "-" at 58.877,22.149 h1.02
  text "SPI2" at 58.955,20.358 h1.52
Mechanical 1:
  lines w0.203: 0.076,46.138 cw(c4.038,46.114) 4.012,50.076 61.14,50.076 ; 0.076,46.14 0.076,4.012 ccw(c4.038,4.038) 4.014,0.076 ; 4.012,0.076 61.14,0.076 ccw(c61.114,4.038) 65.076,4.014 ; 61.138,50.076 cw(c61.114,46.114) 65.076,46.14 65.076,4.012